# EAGLE board fio_shield_v1.0 (EAGLE 5.00)
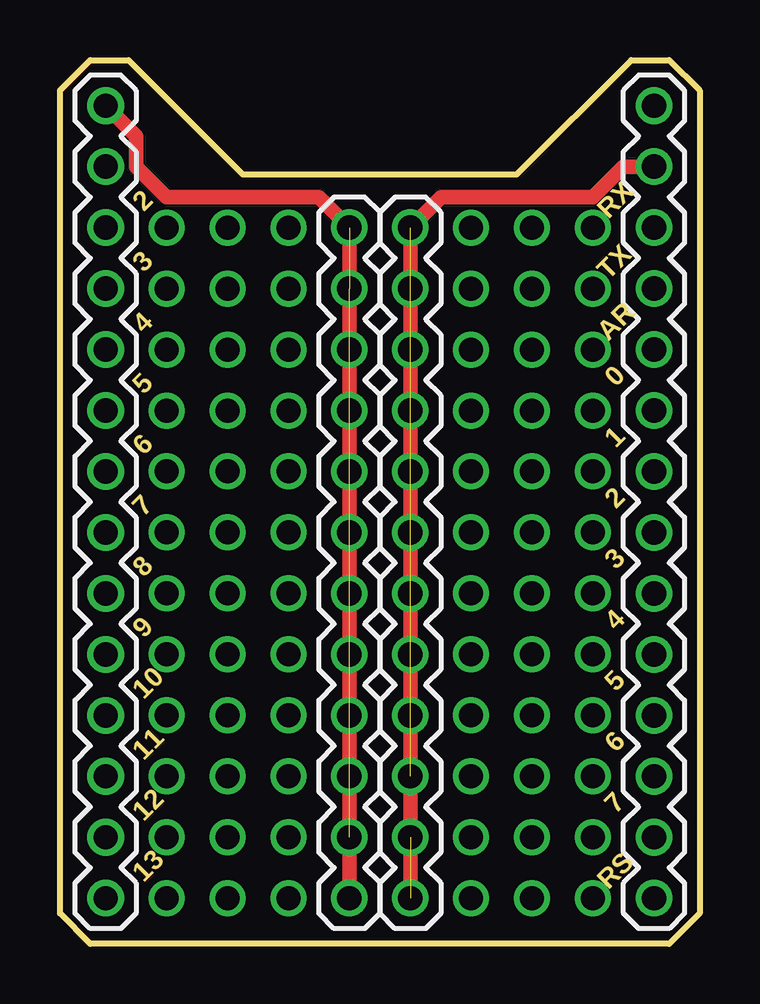
[diagram p0: board, top side]

Size 26.67 x 36.83 mm. Coordinates in mm from the lower left corner, seen from the top.
Outline: 0,35.56 1.27,36.83 2.86,36.83 7.62,32.07 19.05,32.07 23.81,36.83 25.4,36.83 26.67,35.56 26.67,1.27 25.4,0 1.27,0 0,1.27 0,35.56
Copper layers (1*16): Top 0.035mm / dielectric 1.5mm / Bottom 0.035mm
Design rules "default": minimum track width 10mil, minimum drill 24mil, track to track 8mil, track to pad 8mil, pad to pad 8mil, via to via 8mil, smd to smd 8mil, copper to edge 40mil, drill to drill 8mil, minimum pad ring 10mil, minimum via ring 8mil, stop-mask expansion 4mil, vias tented up to drill 0mil, thermal gap 10mil

## Footprints (pad centres in the part's own frame; a part is rotated, then mirrored left to right if it is on the bottom)
1X14 = drill 1.016 round: 1 0,0; 2 2.54,0; 3 5.08,0; 4 7.62,0; 5 10.16,0; 6 12.7,0; 7 15.24,0; 8 17.78,0; 9 20.32,0; 10 22.86,0; 11 25.4,0; 12 27.94,0; 13 30.48,0; 14 33.02,0
1X12 = drill 1.016 round: 1 0,0; 2 2.54,0; 3 5.08,0; 4 7.62,0; 5 10.16,0; 6 12.7,0; 7 15.24,0; 8 17.78,0; 9 20.32,0; 10 22.86,0; 11 25.4,0; 12 27.94,0

## Placement (x,y rotation side)
JP1  M14  [1X14]  1.91,34.93 270 top
JP2  M14  [1X14]  24.77,34.93 270 top
JP5  M12PTH  [1X12]  12.07,29.84 270 top
JP6  M12PTH  [1X12]  14.61,29.84 270 top

## Library data of the parts
JP1 JP2 JP5 JP6 = SparkFun

## Nets
GND: JP2.2 JP6.1 JP6.2 JP6.3 JP6.4 JP6.5 JP6.6 JP6.7 JP6.8 JP6.9 JP6.10 JP6.11 JP6.12
VCC: JP1.1 JP5.1 JP5.2 JP5.3 JP5.4 JP5.5 JP5.6 JP5.7 JP5.8 JP5.9 JP5.10 JP5.11 JP5.12

## Tracks (layer width: path | path; a pad name or v marks a point on that pad's centre or on a via)
GND  (10 unrouted)
  Top 0.61: JP6.12 JP6.1 15.88,31.12 22.23,31.12 23.5,32.38 JP2.2
N$1  (via drill 1)
  other vias: 4.45,29.84
N$2  (via drill 1)
  other vias: 6.98,29.84
N$3  (via drill 1)
  other vias: 9.53,29.84
N$4  (via drill 1)
  other vias: 17.14,29.84
N$5  (via drill 1)
  other vias: 19.68,29.84
N$6  (via drill 1)
  other vias: 22.23,29.84
N$7  (via drill 1)
  other vias: 4.45,27.3
N$8  (via drill 1)
  other vias: 6.98,27.3
N$9  (via drill 1)
  other vias: 9.53,27.3
N$10  (via drill 1)
  other vias: 4.45,24.77
N$11  (via drill 1)
  other vias: 6.98,24.77
N$12  (via drill 1)
  other vias: 9.53,24.77
N$13  (via drill 1)
  other vias: 4.45,22.23
N$14  (via drill 1)
  other vias: 6.98,22.23
N$15  (via drill 1)
  other vias: 9.53,22.23
N$16  (via drill 1)
  other vias: 4.45,19.69
N$17  (via drill 1)
  other vias: 6.98,19.69
N$18  (via drill 1)
  other vias: 9.53,19.69
N$19  (via drill 1)
  other vias: 4.45,17.15
N$20  (via drill 1)
  other vias: 6.98,17.15
N$21  (via drill 1)
  other vias: 9.53,17.15
N$22  (via drill 1)
  other vias: 4.45,14.61
N$23  (via drill 1)
  other vias: 6.98,14.61
N$24  (via drill 1)
  other vias: 9.53,14.61
N$25  (via drill 1)
  other vias: 4.45,12.07
N$26  (via drill 1)
  other vias: 6.98,12.07
N$27  (via drill 1)
  other vias: 9.53,12.07
N$28  (via drill 1)
  other vias: 4.45,9.53
N$29  (via drill 1)
  other vias: 6.98,9.53
N$30  (via drill 1)
  other vias: 9.53,9.53
N$31  (via drill 1)
  other vias: 4.45,6.98
N$32  (via drill 1)
  other vias: 6.98,6.98
N$33  (via drill 1)
  other vias: 9.53,6.98
N$34  (via drill 1)
  other vias: 4.45,4.45
N$35  (via drill 1)
  other vias: 6.98,4.45
N$36  (via drill 1)
  other vias: 9.53,4.45
N$37  (via drill 1)
  other vias: 4.45,1.91
N$38  (via drill 1)
  other vias: 6.98,1.91
N$39  (via drill 1)
  other vias: 9.53,1.91
N$40  (via drill 1)
  other vias: 17.14,27.3
N$41  (via drill 1)
  other vias: 19.68,27.3
N$42  (via drill 1)
  other vias: 22.23,27.3
N$43  (via drill 1)
  other vias: 17.14,24.77
N$44  (via drill 1)
  other vias: 19.68,24.77
N$45  (via drill 1)
  other vias: 22.23,24.77
N$46  (via drill 1)
  other vias: 17.14,22.23
N$47  (via drill 1)
  other vias: 19.68,22.23
N$48  (via drill 1)
  other vias: 22.23,22.23
N$49  (via drill 1)
  other vias: 17.14,19.69
N$50  (via drill 1)
  other vias: 19.68,19.69
N$51  (via drill 1)
  other vias: 22.23,19.69
N$52  (via drill 1)
  other vias: 17.14,17.15
N$53  (via drill 1)
  other vias: 19.68,17.15
N$54  (via drill 1)
  other vias: 22.23,17.15
N$55  (via drill 1)
  other vias: 17.14,14.61
N$56  (via drill 1)
  other vias: 19.68,14.61
N$57  (via drill 1)
  other vias: 22.23,14.61
N$58  (via drill 1)
  other vias: 17.14,12.07
N$59  (via drill 1)
  other vias: 19.68,12.07
N$60  (via drill 1)
  other vias: 22.23,12.07
N$61  (via drill 1)
  other vias: 17.14,9.53
N$62  (via drill 1)
  other vias: 19.68,9.53
N$63  (via drill 1)
  other vias: 22.23,9.53
N$64  (via drill 1)
  other vias: 17.14,6.98
N$65  (via drill 1)
  other vias: 19.68,6.98
N$66  (via drill 1)
  other vias: 22.23,6.98
N$67  (via drill 1)
  other vias: 17.14,4.45
N$68  (via drill 1)
  other vias: 19.68,4.45
N$69  (via drill 1)
  other vias: 22.23,4.45
N$70  (via drill 1)
  other vias: 17.14,1.91
N$71  (via drill 1)
  other vias: 19.68,1.91
N$72  (via drill 1)
  other vias: 22.23,1.91
VCC  (10 unrouted)
  Top 0.61: JP5.12 JP5.1 10.8,31.12 4.45,31.12 3.18,32.38 3.18,33.66 JP1.1

## Text on the board
Dimension: 2 | RX | 3 | TX | 4 | AR | 0 | 5 | 6 | 1 | 2 | 7 | 8 | 3 | 9 | 4 | 10 | 5 | 11 | 6 | 7 | 12 | 13 | RS